# Altium PCB PCB.PcbDoc
Units mm, origin at the board's own origin, x right, y up, seen from the top; angles counter-clockwise.
Board outline 30 x 25.4 mm, 2 copper layers (Top Layer, Bottom Layer), stack 1.595 mm thick; 44 components, 36 nets, 202 pads, 0 vias.
Unrouted connection lines stored in the file: 137.
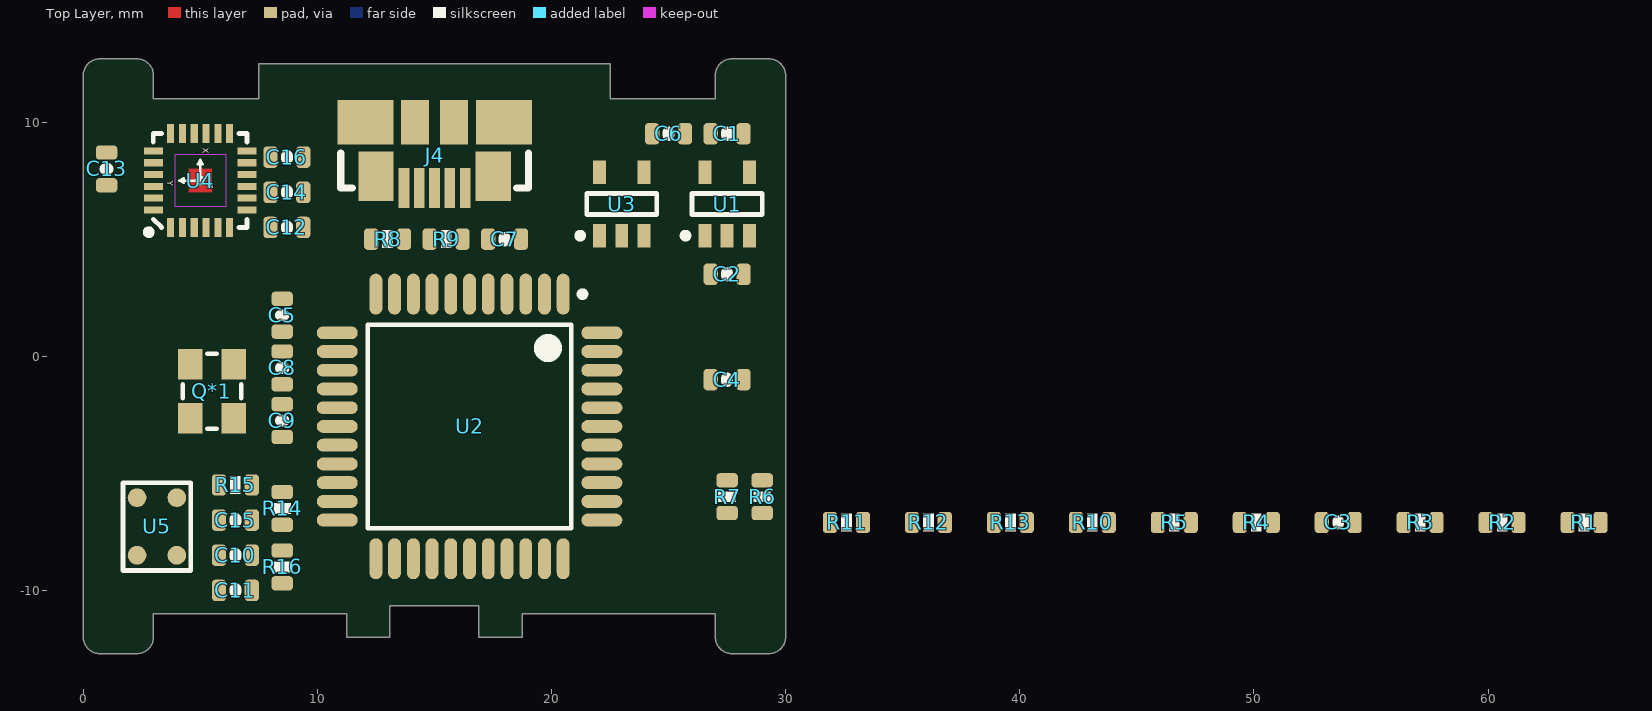
[diagram p0: Top Layer view]
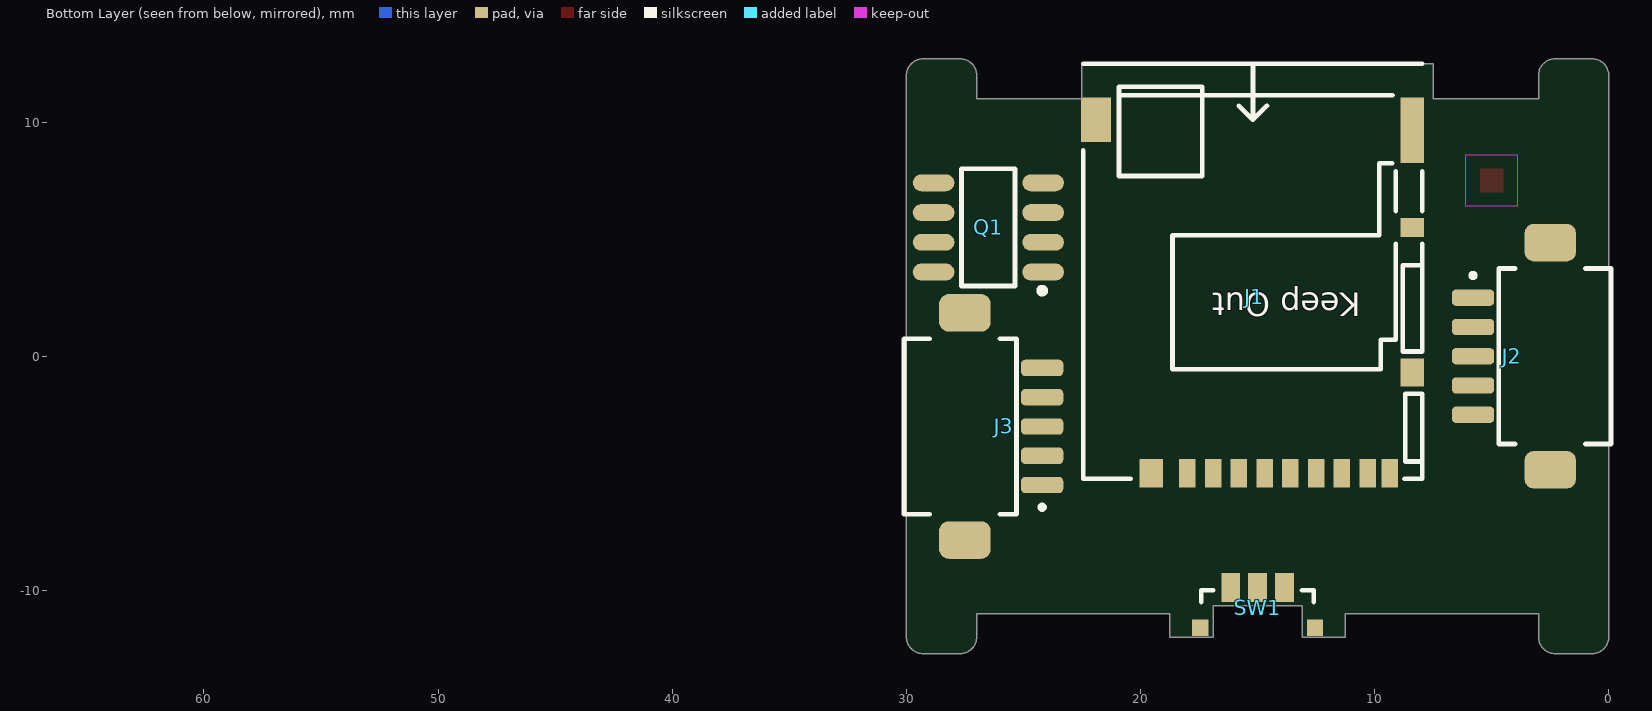
[diagram p1: Bottom Layer view, seen from below]

## Layer stack, top to bottom
Top Solder: solder mask 0.0254, Solder Resist, Dk 3.5
Top Layer: signal copper 0.0356
Dielectric 1: core 1.524, FR-4, Dk 4.6
Bottom Layer: signal copper 0.0356
Bottom Solder: solder mask 0.0254, Solder Resist, Dk 3.5

## Board outline
0,-11.985 ccw(c0.715,-11.985) 0.715,-12.7 2.3,-12.7 ccw(c2.3,-12) 3,-12 3,-11 11.25,-11 11.25,-12 13.1,-12 13.1,-10.65 16.9,-10.65 16.9,-12 18.75,-12 18.75,-11 27,-11 27,-12 ccw(c27.7,-12) 27.7,-12.7 29.285,-12.7 ccw(c29.285,-11.985) 30,-11.985 30,11.985 ccw(c29.285,11.985) 29.285,12.7 27.7,12.7 ccw(c27.7,12) 27,12 27,11 22.5,11 22.5,12.5 7.5,12.5 7.5,11 3,11 3,12 ccw(c2.3,12) 2.3,12.7 0.715,12.7 ccw(c0.715,11.985) 0,11.985

## Design rules (kind name [scope] priority, off if disabled: settings)
AssemblyTestPointUsage [InNetClass('TP')] p1:
Clearance [All] p1: gap=0.2
DiffPairsRouting [All] p1: maxlimit=0.254 minlimit=0.254 mostfreqgap=0.254 toplayer_minwidth=0.381 toplayer_maxwidth=0.381 toplayer_prefwidth=0.381 bottomlayer_minwidth=0.381 bottomlayer_maxwidth=0.381 bottomlayer_prefwidth=0.381 maxuncoupledlength=12.7
HoleSize [All] p1: absolutevalues=TRUE maxlimit=2.54 minlimit=0.33 maxpercent=80.000 minpercent=20.000
PolygonConnect [All] p1: connectstyle=Relief reliefconductorwidth=0.254 reliefentries=4 polygonreliefangle="90 Angle" airgapwidth=0.254
RoutingVias [All] p1: holewidth=0.35 width=0.8 viastyle="Through Hole" minholewidth=0.35 minwidth=0.8 maxholewidth=0.35 maxwidth=0.8
SolderMaskExpansion [All] p1: expansion=0.102
Width [All] p1: maxlimit=0.2 minlimit=0.2 preferedwidth=0.2
27 further rules are at their usual default settings.

## Classes and differential pairs
net class TP: +3.3V GND MISO MOSI RESET SCLK
net class USB: D_N D_P
net class SPI: CS MISO MOSI SCLK
differential pair D: +D_P -D_N
differential pair D1: +D1_P -D1_N

## Components (designator, comment, footprint, x,y, rotation, side; value= is the part's Value field where it differs from the comment)
C1 "CAP" C0603 27.5,9.5 r0 top
C2 "CAP" C0603 27.5,3.5 r0 top
C3 "CAP" C0603 53.6,-7.1 r180 top
C4 "CAP" C0603 27.5,-1 r180 top
C5 "CAP" C0603 8.5,1.75 r90 top
C6 "CAP" C0603 25,9.5 r0 top
C7 "CAP" C0603 18,5 r0 top
C8 "CAP" C0603 8.5,-0.5 r90 top
C9 "CAP" C0603 8.5,-2.75 r270 top
C10 "CAP" C0603 6.5,-8.5 r0 top
C11 "CAP" C0603 6.5,-10 r0 top
C12 "CAP" C0603 8.7,5.5 r0 top
C13 "CAP" C0603 1,8 r90 top
C14 "CAP" C0603 8.7,7 r0 top
C15 "CAP" C0603 6.5,-7 r0 top
C16 "CAP" C0603 8.7,8.5 r0 top
J1 "DM3AT-SF-PEJM5" USD_DM3AT 18,-5 r90 bottom
J2 "HDR_TAB_1x5" DF13A-5P-1.25H 2.5,0 r270 bottom
J3 "HDR_TAB_1x5" DF13A-5P-1.25H 27.5,-3 r90 bottom
J4 "Molex 47346-0001" "Molex 47346-0001" 15,10 r270 top
Q1 "MOSFET_N" SO-8 26.5,5.5 r0 bottom
Q*1 "Crystal_4pin" SMD4_3.2x2.50mm_ABM8 5.5,-1.5 r270 top
R1 "RES" R0603 64.1,-7.1 r180 top
R2 "RES" R0603 60.6,-7.1 r180 top
R3 "RES" R0603 57.1,-7.1 r180 top
R4 "RES" R0603 50.1,-7.1 r180 top
R5 "RES" R0603 46.6,-7.1 r180 top
R6 "RES" R0603 29,-6 r270 top
R7 "RES" R0603 27.5,-6 r90 top
R8 "RES" R0603 13,5 r0 top
R9 "RES" R0603 15.5,5 r0 top
R10 "RES" R0603 43.1,-7.1 r180 top
R11 "RES" R0603 32.6,-7.1 r180 top
R12 "RES" R0603 36.1,-7.1 r180 top
R13 "RES" R0603 39.6,-7.1 r180 top
R14 "RES" R0603 8.5,-6.5 r90 top
R15 "RES" R0603 6.5,-5.5 r0 top
R16 "RES" R0603 8.5,-9 r90 top
SW1 "EVPAE" EVPAEJB2A 15,-10.5 r180 bottom
U1 "MIC5219" SOT-23-5 27.5,6.5 r90 top
U2 "ATmega32U4-AU" ATMEL-TQFP44_ml 16.5,-3 r270 top
U3 "MCP73832" SOT-23-5 23,6.5 r90 top
U4 "MPU6050" QFN24_4X4X0.9mm 5,7.5 r90 top
U5 "SPU0414HR5H" SPU0414HR5H 4,-8.5 r180 top

## Footprints (in the part's own frame and the unit in brackets; to place one, negate y for a bottom-side part, rotate by r counter-clockwise, add the part's x,y. Pads: shape width x height; smd on the part's side, far side on the other; paste and mask are expansions set on the pad)
ATMEL-TQFP44_ml [mm] "Thin QFP, 44-Leads, Body 10x10mm, Pitch 0.8mm, IPC Medium Density"
  oval 1.75x0.55 smd: 1(-5.65,4) 2(-5.65,3.2) 3(-5.65,2.4) 4(-5.65,1.6) 5(-5.65,0.8) 6(-5.65,0) 7(-5.65,-0.8) 8(-5.65,-1.6) 9(-5.65,-2.4) 10(-5.65,-3.2) 11(-5.65,-4) 23(5.65,-4) 24(5.65,-3.2) 25(5.65,-2.4) 26(5.65,-1.6) 27(5.65,-0.8) 28(5.65,0) 29(5.65,0.8) 30(5.65,1.6) 31(5.65,2.4) 32(5.65,3.2) 33(5.65,4)
  oval 0.55x1.75 smd: 12(-4,-5.65) 13(-3.2,-5.65) 14(-2.4,-5.65) 15(-1.6,-5.65) 16(-0.8,-5.65) 17(0,-5.65) 18(0.8,-5.65) 19(1.6,-5.65) 20(2.4,-5.65) 21(3.2,-5.65) 22(4,-5.65) 34(4,5.65) 35(3.2,5.65) 36(2.4,5.65) 37(1.6,5.65) 38(0.8,5.65) 39(0,5.65) 40(-0.8,5.65) 41(-1.6,5.65) 42(-2.4,5.65) 43(-3.2,5.65) 44(-4,5.65)
  silkscreen extent -5.77,-4.35 4.35,4.95, body extent -6.01,-6.01 6.01,6.01, height 1.35
C0603 [mil]
  rrect50% 24x36 smd mask+0: 1(-27.56,0) 2(27.56,0)
  silkscreen extent 0,-2 0,2, body extent -31,-16 32,16, height 34
DF13A-5P-1.25H [mm]
  rrect50% 0.7x1.8 smd: 1(-2.5,-3.3) 2(-1.25,-3.3) 3(0,-3.3) 4(1.25,-3.3) 5(2.5,-3.3)
  rrect50% 1.6x2.2 smd: TAB(-4.85,0) TAB(4.85,0)
  silkscreen extent -3.75,-3.4 3.75,2.6, body extent -5.45,-3.8 5.45,2.7, height 3.6
EVPAEJB2A [mm]
  rect 0.7x0.7 smd: 0(-2.45,-1.1) 0(2.45,-1.1)
  rect 0.8x1.25 smd: 1(-1.15,0.625) 2(0,0.625) 3(1.15,0.625)
  silkscreen extent -2.4,0 2.4,0.5, body extent -2.4,-2.1 2.4,0.5, height 0.95
"Molex 47346-0001" [mil]
  rect 67x18 smd: D+(111,0) D-(111,26) GND(111,-51.18) ID(111,-25.59) VBUS(111,52)
  rect 75x94 smd: GND1(0,117) GND4(0,-116.14)
  rect 83x59 smd: GND2(91,99) GND3(91,-98.43)
  rect 75x47 smd: GND5(0,-32.97) GND6(0,33)
  silkscreen extent 52,-157 111,158, body extent -94,-157 120,157, height 107
QFN24_4X4X0.9mm [mil] "QFN, 24-Leads, Body 3.00x3.00mm, Pitch 0.40mm, Thermal Pad 1.54x1.70mm, IPC High Density"
  rect 32x12 smd: 1(-78.74,50) 2(-78.74,30) 3(-78.74,10) 4(-78.74,-9.84) 5(-78.74,-29.53) 6(-78.74,-49.21) 13(79,-49.21) 14(79,-29.53) 15(79,-9.84) 16(79,10) 17(79,30) 18(79,50)
  rect 12x32 smd: 7(-49.21,-78.74) 8(-29.53,-78.74) 9(-9.84,-78.74) 10(10,-78.74) 11(30,-78.74) 12(50,-78.74) 19(50,79) 20(30,79) 21(10,79) 22(-9.84,79) 23(-29.53,79) 24(-49.21,79)
  Top Layer region: -19.68,-19.68 20,-19.68 20,20 -19.68,20
  Keep-Out Layer region: -43.3,-43.3 43.31,-43.3 43.31,43.31 -43.3,43.31
  silkscreen extent -92,-79 79,92, body extent -79,-79 79,79, height 35
R0603 [mil]
  rrect50% 24x36 smd mask+0: 1(-27.56,0) 2(27.56,0)
  silkscreen extent -9,-15 9,15, body extent -31,-16 32,16, height 18
SMD4_3.2x2.50mm_ABM8 [mm]
  rect 1.3x1.05 smd: 1(-1.15,-0.925) 2(1.15,-0.925) 3(1.15,0.925) 4(-1.15,0.925)
  silkscreen extent -1.6,-1.25 1.6,1.25, body extent -1.6,-1.24 1.6,1.24, height 0.8
SO-8 [mm] "SOIC, 8-Leads, Body 4.90x3.90mm, Pitch 1.27mm, IPC Medium Density"
  oval 1.78x0.72 smd: 1(-2.34,1.905) 2(-2.34,0.635) 3(-2.34,-0.635) 4(-2.34,-1.905) 5(2.34,-1.905) 6(2.34,-0.635) 7(2.34,0.635) 8(2.34,1.905)
  silkscreen extent -2.42,-2.5 1.14,2.82, body extent -3.1,-2.5 3.1,2.5, height 1.75
SOT-23-5 [mm] "SOT23, 5-Leads, Body 2.92x2.80mm, Pitch 0.95mm, IPC Medium Density"
  rect 1x0.55 smd: 1(-1.35,0.95) 2(-1.35,0) 3(-1.35,-0.95) 4(1.35,-0.95) 5(1.35,0.95)
  silkscreen extent -1.47,-1.5 0.45,1.9, body extent -1.25,-1.5 1.25,1.5, height 1.1
SPU0414HR5H [mm]
  round 0.8 smd paste+0: 1(1.7,0) 2(1.7,-2.46) 3(0,-2.46) 4(0,0)
  silkscreen extent -0.6,-3.1 2.3,0.65, body extent -0.62,-3.11 2.33,0.65, height 1.1
USD_DM3AT [mm]
  rect 1.2x0.7 smd: 1(0,0) 2(0,-1.1) 3(0,-2.2) 4(0,-3.3) 5(0,-4.4) 6(0,-5.5) 7(0,-6.6)
  rect 1.2x0.7 smd mask+0.07: 8(0,-7.7) 9(0,-8.65)
  rect 1.2x1 smd: 10(4.3,-9.6) 14(0,1.55)
  rect 0.8x1 smd: 11(10.5,-9.6)
  rect 2.8x1 smd: 12(14.65,-9.6)
  rect 1.9x1.3 smd: 13(15.1,3.9)
  silkscreen extent -0.23,-10.03 17.49,4.45, body extent -0.1,-9.7 16.05,4.15, height 1.68

## Part data
C1 C7: library part C01293, "CAP CER 1UF 16V X7R 0603"
C2 C3 C4 C5 C6 C10 C11 C12 C14 C15 C16: library part C01052, "CAP CER 0.1UF 16V X7R 0603"
C8 C9: library part C00144, "CAP CER 22PF 50V NP0 0603"
C13: library part C00648, "CAP CER 2200PF 50V X7R 0603"
J1: library part J00167, "CONN MICRO SD CARD PUSH-PUSH R/A"
J2 J3: library part J00022, "CONN HEADER 5POS 1.25MM R/A TIN"
J4: library part USB
Q1: library part Q000008, "MOSFET P-CH 30V 5.8A 8-SOIC"
Q*1: library part Q00342, "CRYSTAL 16.0000MHZ 18PF SMD"
R1 R2 R3 R10 R14 R16: library part R00189, "RES SMD 100K OHM 1% 1/10W 0603"
R4 R5 R11 R12 R13: library part R00109, "RES SMD 2.2K OHM 1% 1/10W 0603"
R6 R8 R9 R15: library part R00015, "RES SMD 22 OHM 1% 1/10W 0603"
R7: library part R00093, "RES SMD 1K OHM 1% 1/10W 0603"
SW1: library part SW000001, "SWITCH TACTILE SPST-NO 0.02A 15V"
U1: library part PMIC000001, "IC REG LDO 3.3V 0.5A SOT23-5"
U2: library part MCU00751, "IC MCU 8BIT 32KB FLASH 44TQFP"
U3: library part P000002, "IC LI-ION/LI-POLY CTRLR SOT23-5"
U4: library part P000004, "GYRO/ACCELEROMETER 6AXIS 24QFN"
U5: library part P000005, "MIC MEMS ANALOG OMNI -22DB"

## Nets (pads, with @x,y where several pads share a name; then routed paths per layer and width w, separated by ;. In a path a pad name is that pad's centre, name@x,y a point inside that pad or via, vN(x,y) a via of type N, cw(c..) or ccw(c..) an arc to the next point about the centre after c; other vN are vias at no path point)
+3.3V: C1.1 C2.1 C4.1 C5.1 C12.1 C16.1 J1.4 R1.2 R4.1 R10.2 R11.1 R12.1 R13.1 R13.2 U1.5 U2.2 U2.14 U2.24 U2.28 U2.34 U2.42 U2.44 U4.8 U4.12 U4.13
+3.3V_AUDIO: C11.1 R14.2 U2.40 U5.1
+BAT: J2.4 J2.5 J3.1 J3.2 R2.2 U1.1 U1.3 U3.3
+VBUS: C6.1 J4.VBUS U2.7 U3.4
AUDIO: C10.2 R14.1 R16.2 U2.41
BAT_SENSE: C3.1 R2.1 R3.2 U2.39
BAT_STAT: R4.2 U2.38 U3.1
CS: J1.2 U2.8
D1_N: J4.D- R8.1
D1_P: J4.D+ R9.1
D_N: R8.2 U2.3
D_P: R9.2 U2.4
GND: C1.2 C2.2 C3.2 C4.2 C5.2 C6.2 C7.2 C8.2 C9.2 C11.2 C12.2 C13.2 C14.2 C15.2 C16.2 J1.6 J1.9 J1.10 J1.12 J1.13 J1.14 J2.1 J2.2 J2.TAB J3.TAB J4.GND J4.GND1 J4.GND2 J4.GND3 J4.GND4 Q1.1 Q1.2 Q1.3 Q*1.2 Q*1.4 R3.1 R5.2 R7.2 R16.1 SW1.0 SW1.1 SW1.3 U1.2 U2.5 U2.15 U2.23 U2.33 U2.35 U2.43 U3.2 U4.1 U4.9 U4.11 U4.18 U5.2
LED_DATA: J3.3 U2.30
LED_GND: J3.4 J3.5 Q1.5 Q1.6 Q1.7 Q1.8
LED_POWER: R6.1 U2.12
MISO: J1.7 U2.11
MOSI: J1.3 U2.10
NetC10_1: C10.1 U5.4
NetC13_1: C13.1 U4.20
NetC14_1: C14.1 U4.10
NetC15_1: C15.1 R15.2
NetQ1_4: Q1.4 R6.2 R7.1
NetR5_1: R5.1 U3.5
NetR15_1: R15.1 U5.3
RESET: U2.13
RX: U2.20
SCL: R12.2 U2.18 U4.23
SCLK: J1.5 U2.9
SD_SW: J1.11 R1.1
SDA: R11.2 U2.19 U4.24
SW: R10.1 SW1.2 U2.29
TX: U2.21
UCAP: C7.1 U2.6
XTAL1: C9.1 Q*1.3 U2.17
XTAL2: C8.1 Q*1.1 U2.16
pads on no net: J1.1 J1.8 J2.3 J4.GND5 J4.GND6 J4.ID U1.4 U2.1 U2.22 U2.25 U2.26 U2.27 U2.31 U2.32 U2.36 U2.37 U4.2 U4.3 U4.4 U4.5 U4.6 U4.7 U4.14 U4.15 U4.16 U4.17 U4.19 U4.21 U4.22

## Silkscreen, mask and mechanical layers (free items; w line width, h text height)
Mechanical 1:
  lines w0.2: 0,-11.985 ccw(c0.715,-11.985) 0.715,-12.7 2.3,-12.7 ccw(c2.3,-12) 3,-12 3,-11 11.25,-11 11.25,-12 13.1,-12 13.1,-10.65 16.9,-10.65 16.9,-12 18.75,-12 18.75,-11 27,-11 27,-12 ccw(c27.7,-12) 27.7,-12.7 29.285,-12.7 ccw(c29.285,-11.985) 30,-11.985 30,-11 30,11 30,11.985 ccw(c29.285,11.985) 29.285,12.7 27.7,12.7 ccw(c27.7,12) 27,12 27,11 22.5,11 22.5,12.5 7.5,12.5 7.5,11 3,11 3,12 ccw(c2.3,12) 2.3,12.7 0.715,12.7 ccw(c0.715,11.985) 0,11.985 0,11 0,-11 0,-11.985
Mechanical 3:
  lines w0.1: -10.08,-12.7 50.88,-12.7 ; -10.08,-11.112 50.88,-11.112 ; -10.08,11.112 50.88,11.112 ; -10.08,12.7 50.88,12.7

## Dimensions
-10.08,11.112 to -10.08,-11.112 on Mechanical 3
-10.08,12.7 to -10.08,-12.7 on Mechanical 3
-10.08,-12.7 to -10.08,12.7 on Mechanical 3

## Text inside footprints (layer, text, board x,y; h text height)
J1: Bottom Overlay "Keep Out" at 10.6,2.7 h1 r180
U4: Top Overlay "Z" at 5.3,7.4 h0.26 r270; Top Overlay "Y" at 3.59,7.5 h0.26 r270; Top Overlay "X" at 5.1,8.906 h0.26 r270